# Altium PCB A25_PROJET_SEPIC_PCB.PcbDoc
Units mm, origin at the board's own origin, x right, y up, seen from the top; angles counter-clockwise.
Board outline 100 x 50 mm, 2 copper layers (Top Layer, Bottom Layer); 33 components, 23 nets, 90 pads, 7 vias.
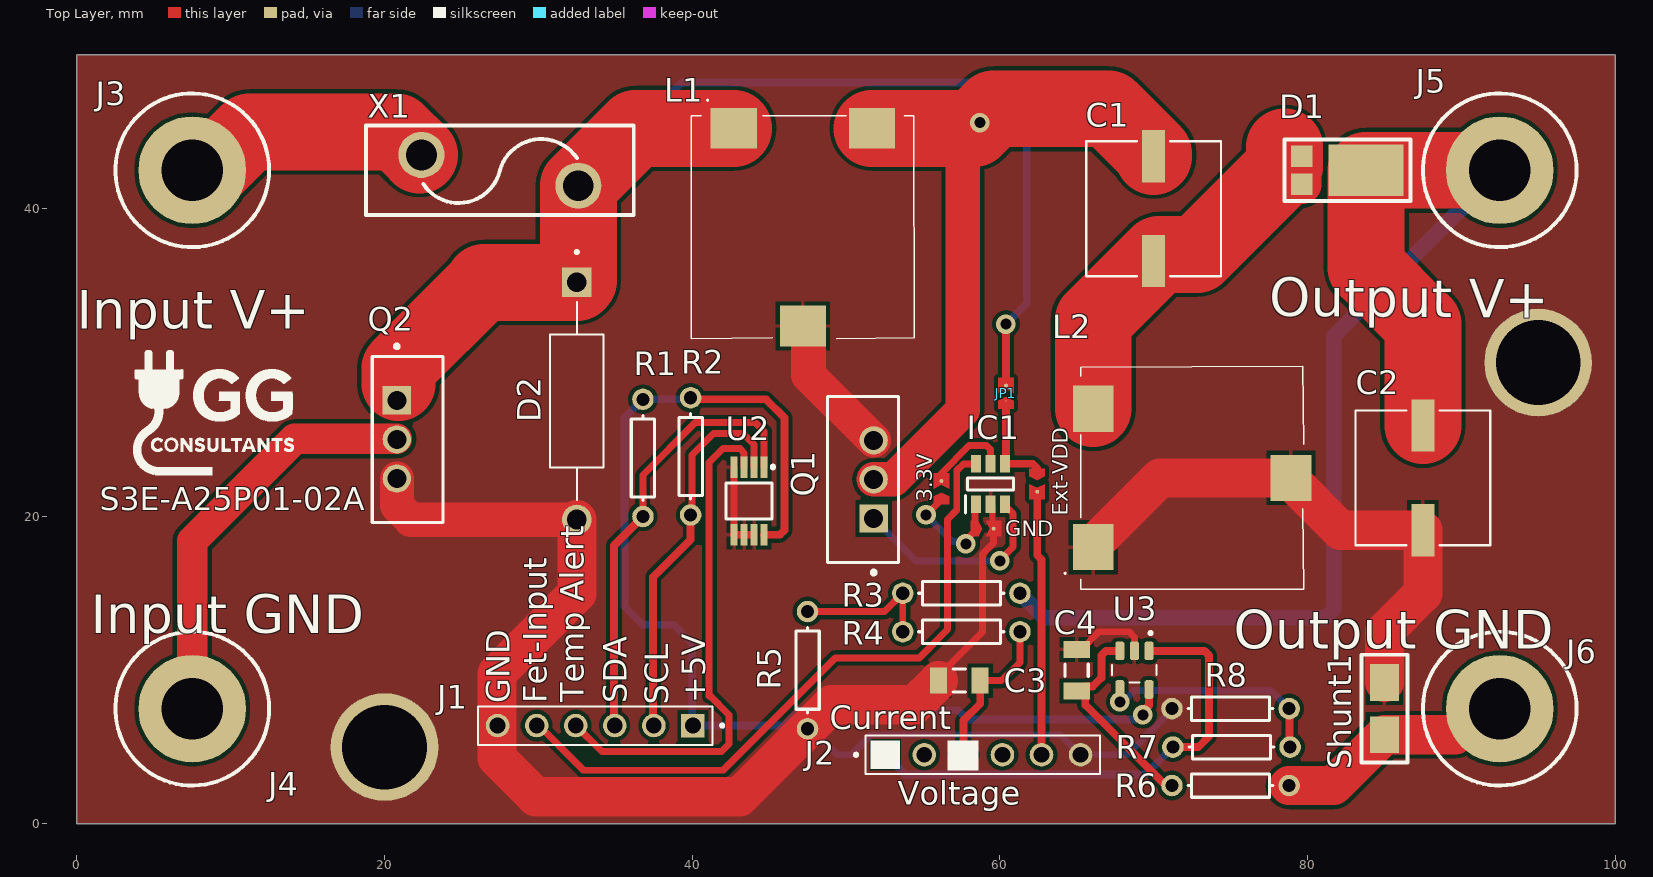
[diagram p0: Top Layer view]
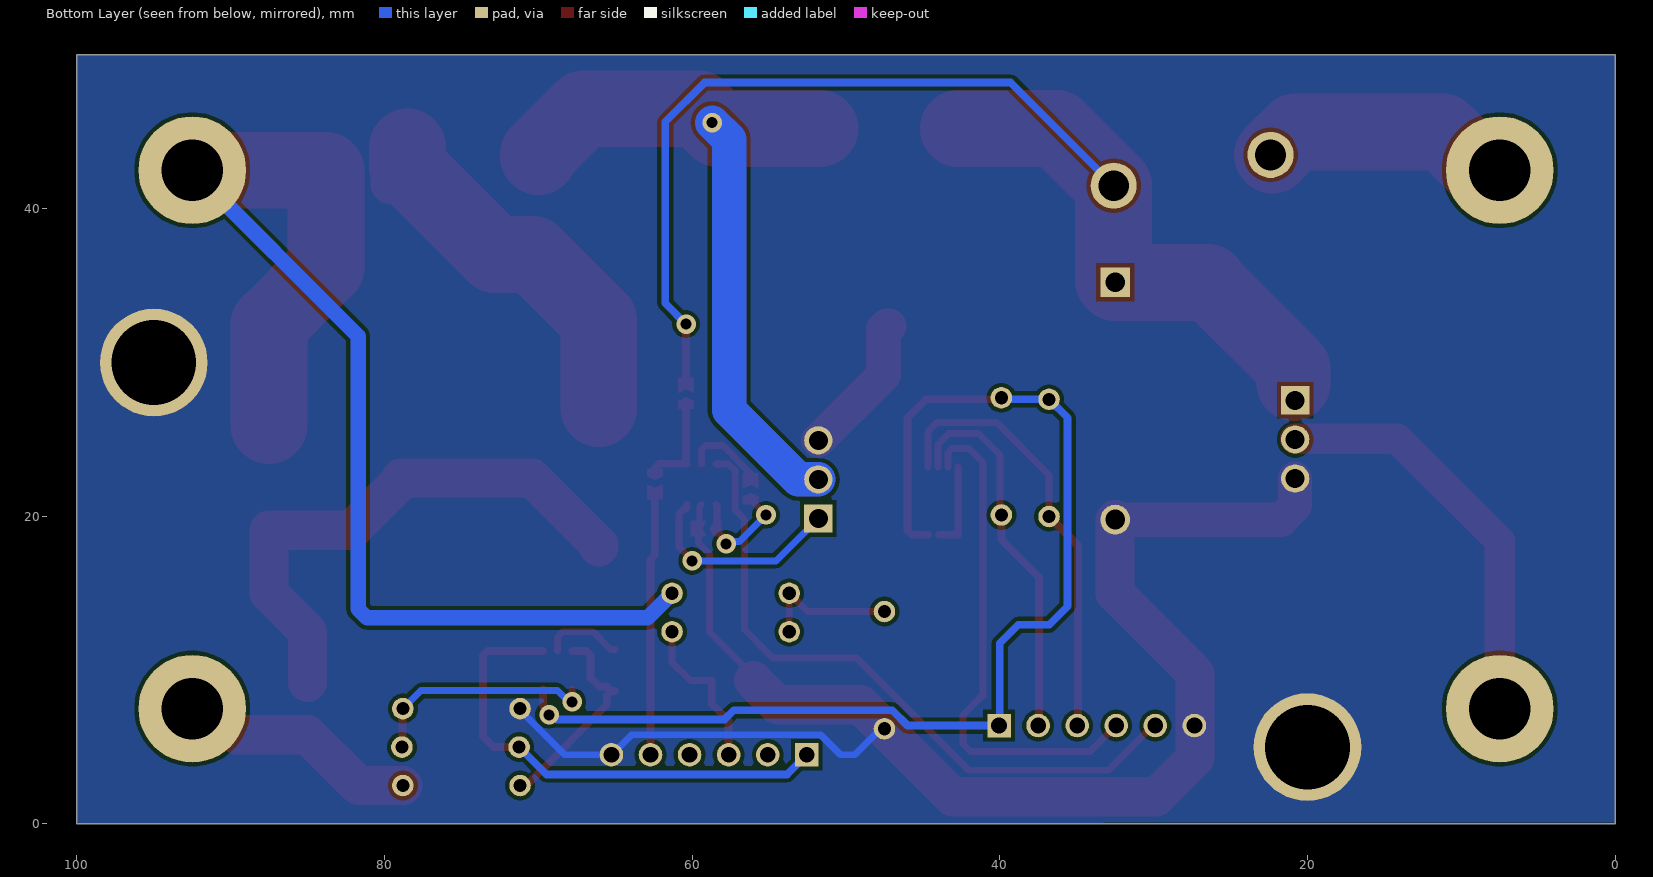
[diagram p1: Bottom Layer view, seen from below]

## Layer stack, top to bottom
Top Solder: solder mask 0.0102, Solder Resist, Dk 3.5
Top Layer: signal copper 0.0356
Dielectric 1: dielectric 0.32, FR-4, Dk 4.8
Bottom Layer: signal copper 0.0356
Bottom Solder: solder mask 0.0102, Solder Resist, Dk 3.5

## Board outline
0,0 100,0 100,50 0,50

## Design rules (kind name [scope] priority, off if disabled: settings)
Clearance [All] p1: gap=0.254 ignorepadtopadclearanceinfootprint=TRUE except(0: THPad-Text; 0.127: Arc-Arc Arc-Track Arc-SMDPad Track-Track Track-SMDPad SMDPad-SMDPad)
Height [All] p1: minheight=0 maxheight=100 prefheight=12.7
HoleSize [All] p1: absolutevalues=TRUE maxlimit=5 minlimit=0.025 maxpercent=80.000 minpercent=20.000
MinimumSolderMaskSliver [All] p1: minsoldermaskwidth=0.1
PlaneConnect [All] p1: planeconnectstyle=Direct reliefexpansion=0.508 reliefentries=4 reliefconductorwidth=0.254 reliefairgap=0.254
PolygonConnect [All] p1: thpad.connectstyle=Direct thpad.reliefconductorwidth=0.254 thpad.reliefentries=4 thpad.polygonreliefangle="90 Angle" thpad.airgapwidth=0.254 smdpad.connectstyle=Relief smdpad.reliefconductorwidth=0.254 smdpad.reliefentries=4 smdpad.polygonreliefangle="90 Angle" smdpad.airgapwidth=0.254 via.connectstyle=Direct via.reliefconductorwidth=0.254 via.reliefentries=4 via.polygonreliefangle="90 Angle" via.airgapwidth=0.254
RoutingVias [All] p1: holewidth=0.711 width=1.27 viastyle="Through Hole" minholewidth=0.711 minwidth=1.27 maxholewidth=0.711 maxwidth=1.27
SilkToSilkClearance [All] p1: silktosilkclearance=0.1
SilkToSolderMaskClearance [IsPad] p1: minsilkscreentomaskgap=0.1 clearancetoexposedcopper=TRUE
SolderMaskExpansion [All] p1: expansion=0.102 istentingtop=FALSE
SupplyNets "Schematic Supply Nets_1" [InNet('GND')] p1: voltage=0.000
SupplyNets "Schematic Supply Nets" [InNet('+5')] p2: voltage=0.000
Width [All] p1: maxlimit=5 minlimit=0.254 preferedwidth=0.254 minimp=50.000000 maximp=50.000000 favimp=50.000000
24 further rules are at their usual default settings.

## Classes and differential pairs
component class sepic_schem: 3.3V C1 C2 D1 D2 IC1 J1 J2 J3 J4 J5 J6 JP1 L1 L2 Q1 Q2 R1 R2 U2 X1
component class Current&Voltage-acq: C3 C4 R3 R4 R5 R6 R7 R8 Shunt1 U3

## Components (designator, comment, footprint, x,y, rotation, side; value= is the part's Value field where it differs from the comment)
3.3V "Solder Bridge" Bridge1mmX2mm 56.2,21.8 r90 top (schematic designator "EN (+3.3V)")
C1 "150uF" CAP_A768_KEM 70,40 r270 top
C2 "150uF" CAP_A768_KEM 87.5,22.5 r90 top
C3 "Cap Semi" C1206 57.374,9.319 r0 top value=100pF
C4 "Cap Semi" C1206 65,10 r270 top value=100pF
D1 "SBR10E45P5-7" SBR10E45P5-7 82.5,42.5 r0 top
D2 "1N5360BG" DIOAD1543W101L863D368 32.5,27.5 r270 top
Ext-VDD "Solder Bridge" Bridge1mmX2mm 62.428,22.1 r270 top (schematic designator JP2)
GND "Solder Bridge" Bridge1mmX2mm 59.1,19.2 r0 top
IC1 "NCP51105ASNT1G" SOP95P275X110-6N 59.4,22.1 r90 top (schematic designator IC?)
J1 "PH1-06-UA" ADAMTECH_PH1-06-UA 33.7,6.4 r180 top
J2 "PH1-06-UA" ADAMTECH_PH1-06-UA 58.9,4.5 r0 top
J3 "BananaConnector" banana_connector 7.5,42.5 r0 top
J4 "BananaConnector" banana_connector 7.5,7.5 r0 top
J5 "BananaConnector" banana_connector 92.5,42.5 r0 top
J6 "BananaConnector" banana_connector 92.5,7.5 r0 top
JP1 "Solder Bridge" Bridge1mmX2mm 60.4,28 r90 top
L1 "6.2uH" CDEP147NP6R1MC125 47.2,38.8 r90 top
L2 "6.2uH" CDEP147NP6R1MC125 72.5,22.5 r180 top
Q1 "IRFB7545" IFX-PG-TO220-3-904 51.8,22.4 r180 top
Q2 "IRFB7545" IFX-PG-TO220-3-904 20.8,25 r0 top
R1 "Res1" AXIAL-0.3 36.8,23.8 r90 top value=1K
R2 "Res1" AXIAL-0.3 39.9,23.9 r90 top value=1K
R3 "Res1" AXIAL-0.3 57.5,15 r180 top value=1K
R4 "Res1" AXIAL-0.3 57.5,12.5 r0 top value=1K
R5 "Res1" AXIAL-0.3 47.5,10 r270 top value=1K (schematic designator dR5)
R6 "Res1" AXIAL-0.3 75,2.5 r180 top value=1K
R7 "Res1" AXIAL-0.3 75.06,5 r180 top value=1K
R8 "Res1" AXIAL-0.3 75,7.5 r180 top value=1K
Shunt1 "1m" resistor_1206 85,7.5 r90 top
U2 "MCP9808-E/MS" SOP65P490X110-8N 43.7,21 r270 top
U3 "LMV321AIDBVRG4" SOT95P280X145-5N 68.75,10 r270 top
X1 "MF-R500-2" MF-R500-2 27.5,42.5 r0 top

## Footprints (in the part's own frame and the unit in brackets; to place one, negate y for a bottom-side part, rotate by r counter-clockwise, add the part's x,y. Pads: shape width x height; smd on the part's side, far side on the other; paste and mask are expansions set on the pad)
ADAMTECH_PH1-06-UA [mm]
  rect 1.53x1.53 / inner round 1.53 / far side rect 1.53x1.53 hole 1.02: 1(-6.35,0)
  round 1.53 hole 1.02: 2(-3.81,0) 3(-1.27,0) 4(1.27,0) 5(3.81,0) 6(6.35,0)
  silkscreen extent -8.35,-1.25 7.62,1.25, body extent -7.62,-1.25 7.62,1.25, height 8.5
AXIAL-0.3 [mm] "Axial Device, Thru-Hole; 2 Leads; 0.3 in Pin Spacing"
  round 1.4 hole 0.85: 1(-3.81,0) 2(3.81,0)
  silkscreen extent -2.77,-0.76 2.77,0.76
banana_connector [mm]
  round 7 hole 4: 1(0,0)
  silkscreen extent -5,-5 5,5
Bridge1mmX2mm [mm]
  round 0.025 smd: 1(-0.5,0)
  round 0.25 smd: 2(0.5,0)
  Top Layer region: 0,0.5 1,0.5 1,-0.5 0,-0.5 0.25,0
  Top Layer region: -0.25,0 -0.5,0.5 -1,0.5 -1,-0.5 -0.5,-0.5
  Top Layer region: -0.5,-0.125 -0.548,-0.115 -0.588,-0.088 -0.615,-0.048 -0.625,0 -0.625,0 -0.615,0.048 -0.588,0.088 -0.548,0.115 -0.5,0.125 -0.5,0.125 -0.452,0.115 -0.412,0.088 -0.385,0.048 -0.375,0 -0.375,0 -0.385,-0.048 -0.412,-0.088 -0.452,-0.115 -0.5,-0.125
C1206 [mm] "Chip Capacitor, Body 3.2x1.6mm, IPC High Density"
  rect 1.1x1.7 smd: 1(-1.35,0) 2(1.35,0)
  silkscreen extent -0.4,-0.75 0.4,0.75, body extent -1.7,-0.9 1.7,0.9, height 1.3
CAP_A768_KEM [mil]
  rect 134x59 smd paste+0 mask+0: 1(-134,0) 2(134,0)
  silkscreen extent -173,-173 173,173, body extent -181,-167 181,167, height 494
CDEP147NP6R1MC125 [mm]
  rect 2.65x3 smd: 1(6.425,4.5) 2(6.425,-4.5) 3(-6.425,0)
  silkscreen extent -7.25,-7.25 8.3,7.25, body extent -7.48,-7.25 7.48,7.25, height 0.9
DIOAD1543W101L863D368 [mm]
  rect 1.94x1.94 / inner round 1.94 / far side rect 1.94x1.94 hole 1.29: 1(-7.715,0)
  round 1.94 hole 1.29: 2(7.715,0)
  silkscreen extent -9.78,-1.75 6.43,1.75
IFX-PG-TO220-3-904 [mm] "TO,flange mount,2.54mm pitch;3 pin,4.45mm L X 10.66mm W X 19.15mm H body"
  rect 1.84x1.84 hole 1.24 paste-2539.97 mask+0: 1(0,2.54)
  round 1.84 hole 1.24 paste-2539.97 mask+0: 2(0,0) 3(0,-2.54)
  silkscreen extent -1.6,-5.4 3,6.17, body extent -1.53,-5.33 2.93,5.33, height 19.1
MF-R500-2 [mm]
  round 3 hole 2: 1(-5.1,1) 2(5.1,-1)
  silkscreen extent -8.7,-2.9 8.7,2.9, body extent -8.7,-1.5 8.7,1.5, height 28.75
resistor_1206 [mm]
  rect 2.4x1.9 smd: 1(-1.7,0) 2(1.7,0)
  silkscreen extent -3.5,-1.5 3.5,1.5
SBR10E45P5-7 [mm]
  rect 1.4x1.4 smd: 1(-2.862,-0.92) 1(-2.862,0.92)
  rect 4.86x3.36 smd: 2(1.31,0)
  silkscreen extent -4,-2 4.2,2, body extent -3.25,-1.98 3.25,1.98, height 1.15
SOP65P490X110-8N [mm]
  rect 1.4x0.45 smd: 1(-2.2,0.975) 2(-2.2,0.325) 3(-2.2,-0.325) 4(-2.2,-0.975) 5(2.2,-0.975) 6(2.2,-0.325) 7(2.2,0.325) 8(2.2,0.975)
  silkscreen extent -2.39,-1.5 1.17,1.73, body extent -2.45,-1.5 2.45,1.5, height 1.1
SOP95P275X110-6N [mm]
  rect 1.125x0.65 smd: 1(-1.312,0.95) 2(-1.312,0) 3(-1.312,-0.95) 4(1.312,-0.95) 5(1.312,0) 6(1.312,0.95)
  silkscreen extent -1.88,-1.5 0.4,1.63, body extent -1.64,-1.56 1.46,1.54, height 1.34
SOT95P280X145-5N [mm]
  rrect50% 1.21x0.59 smd: 1(-1.255,0.95) 2(-1.255,0) 3(-1.255,-0.95) 4(1.255,-0.95) 5(1.255,0.95)
  silkscreen extent -2.51,-1.45 0.8,1.45, body extent -1.4,-1.45 1.4,1.45, height 1.45

## Part data
C1 C2: library part A768KS157M1GLAS025, "No Description Available", Manufacturer_Name=Kemet, Copyright="Copyright (C) 2025 Ultra Librarian. All rights reserved.", Manufacturer_Part_Number=A768KS157M1GLAS025
C3 C4: "Capacitor (Semiconductor SIM Model)", LatestRevisionDate=29-May-2009, LatestRevisionNote="IPC-7351 Footprint Added.", PackageDescription="Chip Capacitor", PackageReference=C1206, Published=8-Jun-2000, Publisher="Altium Limited"
D1: "SBR10E45P5-7, low Vf 5W 10A", Package=None, Availability=Unavailable, MF="{'manufacturer': u'onsemi'}", MP=1N5360BG, Price=None
D2: Package=None, Availability=Unavailable, MF="{'manufacturer': u'onsemi'}", MP=1N5360BG, Price=None
IC1: "Integrated Circuit", Manufacturer_Name=onsemi, Datasheet Link=https://www.onsemi.com/pub/Collateral/NCP51105-D.PDF, Height=1.1mm, Manufacturer_Part_Number=NCP51105ASNT1G
J1 J2: "Pin Header 6P .100 Pitch Plug", Package=None, Check_prices=https://www.snapeda.com/parts/PH1-06-UA/Adam+Tech/view-part/?ref=eda, MF="Adam Tech", MP=PH1-06-UA, SnapEDA_Link=https://www.snapeda.com/parts/PH1-06-UA/Adam+Tech/view-part/?ref=snap
L1 L2: library part CDEP147NP-6R1MC-125, "Inductor", Manufacturer_Name=Sumida, Mouser Part Number=851-CDEP147P6R1MC125, Arrow Part Number=CDEP147NP-6R1MC-125, Arrow Price/Stock=https://www.arrow.com/en/products/cdep147np-6r1mc-125/sumida?utm_currency=USD&region=nac, Datasheet Link=https://products.sumida.com/products/pdf/CDEP147.pdf, Height=0.8mm, Manufacturer_Part_Number=CDEP147NP-6R1MC-125, Mouser Price/Stock=https://www.mouser.co.uk/ProductDetail/Sumida/CDEP147NP-6R1MC-125?qs=ttApTud31JaFBwCTy16d0g%3D%3D
Q1 Q2: "Insulated-Gate Field-Effect Transistor (IGFET), N-Channel, Enhancement, Body Diode, Pin 1 Gate, 2 Drain, 3 Source, 3 Pins", Manufacturer="Infineon Technologies", Manufacturer Order Number=IRFB7545, PackageReference=PG-TO220-3-904
R1 R2 R3 R4 R5 R6 R7 R8: "Resistor", LatestRevisionDate=17-Jul-2002, LatestRevisionNote="Re-released for DXP Platform.", PackageDescription="Axial Device, Thru-Hole; 2 Leads; 0.3 in Pin Spacing", PackageReference=AXIAL-0.3, Published=8-Jun-2000, Publisher="Altium Limited"
Shunt1: library part resistor
U2: "Microchip MCP9808-E/MS Temperature Sensor 8-Pin MSOP, -40 - +125 degC", Package="MSOP-8 Microchip", Check_prices=https://www.snapeda.com/parts/MCP9808-E/MS/Microchip/view-part/?ref=eda, MF=Microchip, MP=MCP9808-E/MS, SnapEDA_Link=https://www.snapeda.com/parts/MCP9808-E/MS/Microchip/view-part/?ref=snap
U3: "Single Low-Voltage Rail-to-Rail Output Operational Amplifier see LMV321A for upgraded version 5-SOT-23 -40 to 125", Package="SOT-23-5 Texas Instruments", Check_prices=https://www.snapeda.com/parts/LMV321IDBVRG4/Texas+Instruments/view-part/?ref=eda, MF="Texas Instruments", MP=LMV321IDBVRG4, SnapEDA_Link=https://www.snapeda.com/parts/LMV321IDBVRG4/Texas+Instruments/view-part/?ref=snap

## Free pads (board coordinates)
  round 7 hole 5.5: 8(20,5) 8(95,30)

## Via types
v1: diameter 1.27, hole 0.711, Top Layer to Bottom Layer, 7 vias

## Nets (pads, with @x,y where several pads share a name; then routed paths per layer and width w, separated by ;. In a path a pad name is that pad's centre, name@x,y a point inside that pad or via, vN(x,y) a via of type N, cw(c..) or ccw(c..) an arc to the next point about the centre after c; other vN are vias at no path point)
+5: J1.1 R1.2 R2.2 U2.8 U3.5 | length 74.3
  Top Layer w0.508: R2.2@40.55,27.61 44.79,27.61 46,26.4 46,19.098 45.702,18.8 U2.8 ; v1(69.3,7.1) 69.3,7.306 69.7,7.706 U3.5
  Bottom Layer w0.508: 35.592,26.302 35.592,14.155 36.792,12.955 38.792,12.955 40,11.747 J1.1@40,6.4 ; 35.592,26.402 R1.2 R2.2@39.9,27.61 ; J1.1 46.002,6.4 47,7.398 57.301,7.398 57.899,6.8 68.794,6.8 69.094,7.1 v1(69.3,7.1)
CurrentL_out: J2.1 R7.2 U3.1 | length 31.9
  Top Layer w0.508: U3.1 73.302,11.255 73.6,10.957 73.6,5.7 72.9,5 R7.2@71.25,5
  Bottom Layer w0.508: J2.1 53.823,3.227 69.477,3.227 R7.2@71.25,5
GND: C2.1 C3.1 C4.1 D2.2 GND.2 IC1.2 J1.6 J2.6 L1.3 L2.1 L2.3 pad.8 Q1.3 Q2.3 R5.2 R8.2 Shunt1.2 U2.4 U2.5 U2.6 U2.7 U3.2 | length 160.2
  Top Layer w0.4: IC1.2 59.525,20.663 59.525,19.275 GND.2
  Top Layer w0.45: U2.5 U2.4 ; C3.1 56.024,9.619 58.886,12.481 58.886,17.561 59.6,18.275 GND.2 ; C4.1@65,11.35 65.3,11.35 66.45,12.5 68.4,12.5 68.763,12.137 68.763,11.268 U3.2
  Top Layer w0.5: U2.5 U2.6 U2.7@43.971,18.8
  Top Layer w2.2: Q2.3 20.8,20.688 21.706,19.782
  Top Layer w2.25: 21.706,19.782 D2.2@32.497,19.782 ; L1.3 47.361,32.375 47.561,32.175 47.561,29.179 Q1.3
  Top Layer w2.54: D2.2@32.497,19.782 D2.2 32.5,14.993 27.3,9.793 27.3,4.303 29.831,1.771 43.081,1.771 49.065,7.755 54.459,7.755 C3.1 ; L2.1 66.075,18.175 70.4,22.5 L2.3 ; L2.3@78.925,22.325 82.154,19.096 C2.1 87.5,15 85,12.5 Shunt1.2
  Bottom Layer w0.45: R5.2 47.757,6.19 49.447,4.5 50.343,4.5 51.643,5.8 63.95,5.8 J2.6 68.275,4.5 71.19,7.415 R8.2
Hacheur_IN: IC1.3 Q1.1 | length 13.7
  Top Layer w0.45: v1(60,17.1) 60,17.145 60.867,18.012 60.867,20.187 60.604,20.451 60.45,20.451 60.35,20.55 IC1.3
  Bottom Layer w0.45: Q1.1 54.56,17.1 v1(60,17.1)
I_Sense_In: J6.1 R6.1 Shunt1.1 | length 15.8
  Top Layer w2.54: R6.1 81.7,2.5 Shunt1.1 89.593,5.8 91.293,7.5 J6.1
NetC1_1: C1.1 L1.2 Q1.2 | length 74.1
  Top Layer w2.25: L1.2 L1.2@51.9,45.425 ; Q1.2 53.1,22.4 57.6,26.9 57.6,44.5 v1(58.7,45.6)
  Top Layer w5: L1.2 58.325,45.225 v1(58.7,45.6) 59.6,46.5 67.071,46.5 70,43.571 C1.1
  Bottom Layer w2.25: Q1.2 53.1,22.4 57.6,26.9 57.6,44.5 v1(58.7,45.6)
NetC1_2: C1.2 D1.1 L2.2 | length 25.4
  Top Layer w2.54: C1.2@70.161,36.846 C1.2@70.343,37.028 ; D1.1@79.638,41.58 D1.1@79.638,43.42
  Top Layer w5: L2.2 66.075,32.76 C1.2@70.161,36.846 ; C1.2@70.343,37.028 72.828,37.028 78.5,42.7 78.5,44
NetC4_2: C4.2 R6.2 U3.3 | length 13.6
  Top Layer w0.508: C4.2 C4.2@65.26,8.65 ; U3.3 66.898,11.255 66.6,10.957 66.6,9.5 66.046,8.946 65.556,8.946 C4.2@65.26,8.65 ; R6.2 71.019,2.671 70.629,2.671 65.556,7.744 65.556,8.354 C4.2@65.26,8.65
NetdR5_1: R3.2 R4.1 R5.1 | length 9.2
  Top Layer w0.45: R5.1 52.5,13.81 R3.2 R4.1
"NetEN (+3.3V)_1": 3.3V.1 GND.1 IC1.1 | length 7.8
  Top Layer w0.45: v1(55.2,20.1) 56.2,21.1 3.3V.1 ; v1(57.8,18.214) 57.8,18.436 58.4,19.036 58.4,20.738 IC1.1
  Bottom Layer w0.45: v1(55.2,20.1) 56.929,18.371 57.643,18.371 v1(57.8,18.214)
"NetEN (+3.3V)_2": 3.3V.2 IC1.5 | length 5.5
  Top Layer w0.45: 3.3V.2 56.2,22.8 58,24.6 59.119,24.6 59.382,24.336 59.382,23.43 IC1.5
NetIC?_4: Ext-VDD.1 IC1.4 JP1.1 | length 6.8
  Top Layer w0.3: Ext-VDD.1 62.428,23.119
  Top Layer w0.5: JP1.1 60.4,23.462 IC1.4 62.135,23.412 62.428,23.119
NetJ2_5: Ext-VDD.2 J2.5 | length 17.2
  Top Layer w0.5: Ext-VDD.2 62.428,17.472 62.71,17.19 J2.5
NetR7_1: R7.1 R8.1 U3.4 | length 15.1
  Top Layer w0.45: v1(67.8,7.943) U3.4
  Top Layer w0.508: R8.1 78.84,7.47 78.84,5.03 R7.1@78.87,5
  Bottom Layer w0.45: v1(67.8,7.943) 68.022,7.943 68.758,8.679 77.631,8.679 R8.1
SCL: J1.2 R2.1 U2.2 | length 25
  Top Layer w0.45: R2.1@40,20.09 40,24 41.4,25.4 43.3,25.4 44.025,24.675 U2.2
  Top Layer w0.508: J1.2@37.46,6.4 37.46,16.06 39.9,18.5 R2.1
SDA: J1.3 R1.1 U2.1 | length 28.9
  Top Layer w0.45: R1.1 36.8,22.7 40.2,26.1 44.1,26.1 44.675,25.525 U2.1
  Top Layer w0.508: J1.3@34.92,6.4 34.92,18.11 R1.1
Sepic_Fet_input: IC1.6 J1.5 | length 44.2
  Top Layer w0.45: J1.5@29.576,6.85 32.93,3.495 41.995,3.495 49.3,10.8 54.762,10.8 56.6,12.638 56.6,19.8 57.2,20.4 57.2,22.984 57.628,23.412 IC1.6
Sepic_V+: C2.2 D1.2 J5.1 R3.1 | length 81.1
  Top Layer w5: C2.2 87.5,32.5 83.81,36.19 D1.2 J5.1
  Bottom Layer w1: R3.1 62.91,13.4 81.135,13.4 81.721,13.986 81.721,31.721 J5.1
Source_GND: J4.1 Q2.2 | length 27
  Top Layer w2: J4.1 7.5,18.4 14.14,25.04 Q2.2@20.8,25.04
Source_V+: J3.1 X1.1 | length 16.6
  Top Layer w2.54: J3.1 J3.1@8.707,42.5 ; X1.1@22.276,43.5 X1.1
  Top Layer w5: J3.1@8.707,42.5 11.207,45 20.776,45 X1.1@22.276,43.5
Temp_Alert: J1.4 U2.3 | length 33.4
  Top Layer w0.45: J1.4 34.13,4.7 41.9,4.7 42.4,5.2 42.4,7.1 41.196,8.304 41.104,8.304 41.104,23.404 ; 41.104,23.504 42,24.4 43.1,24.4 43.375,24.125 U2.3
VDD_Gate_Drv: D2.1 JP1.2 L1.1 Q2.1 X1.2 | length 83.6
  Top Layer w0.5: JP1.2 v1(60.4,32.5)
  Top Layer w4.826: 20.9,28.6 20.9,29.65 26.465,35.215
  Top Layer w5: 26.465,35.215 D2.1 32.6,35.315 X1.2 36.325,45.225 L1.1
  Bottom Layer w0.5: X1.2 39.3,48.2 59.2,48.2 61.744,45.656 61.744,33.844 v1(60.4,32.5)
VoltageL_out: C3.2 J2.3 R4.2 | length 10.3
  Top Layer w0.45: C3.2 60.119,9.319 61.31,10.51 R4.2
  Top Layer w0.508: J2.3 57.63,6.73 58.724,7.824 C3.2
pads on no net: J2.2 J2.4

## Polygon pours and split planes (outlines as drawn)
GND on Bottom Layer "GND_L02_P000" (solid, pour order 0): 0,50 0,0.1 100,0 100,50
GND on Top Layer "GND_L01_P001" (solid, pour order 1): 100,50 100,0 0,0 0,50

## Silkscreen, mask and mechanical layers (free items; w line width, h text height)
Top Overlay:
  drawing of 16 lines, arcs and shapes, not listed
  text "Output V+" at 77.5,33 h2.5 r359.64
  text "Input V+" at 0,32.2 h2.5
  text "S3E-A25P01-02A" at 1.5,19.9 h2.54
  text "Input GND" at 0.9,12.4 h2.5
  text "Output GND" at 75.2,11.4 h2.5
  text "Temp Alert" at 32.938,7.904 h1.52 r90
  text "GND" at 28.146,7.854 h1.52 r90
  text "Fet-Input" at 30.538,7.854 h1.52 r90
  text "SDA" at 35.746,7.854 h1.52 r90
  text "+5V" at 40.846,7.854 h1.52 r90
  text "SCL" at 38.446,7.754 h1.52 r90
  text "Current" at 48.954,6.154 h1.52
  text "Voltage" at 53.354,1.262 h1.52
Mechanical 1:
  the board outline again, w0.508